# Altium PCB PCB1.PcbDoc
Units mil, origin at the board's own origin, x right, y up, seen from the top; angles counter-clockwise.
Board outline 6000 x 4000 mil, 2 copper layers (Top Layer, Bottom Layer); 15 components, 34 nets, 111 pads, 0 vias.
Unrouted connection lines stored in the file: 11.
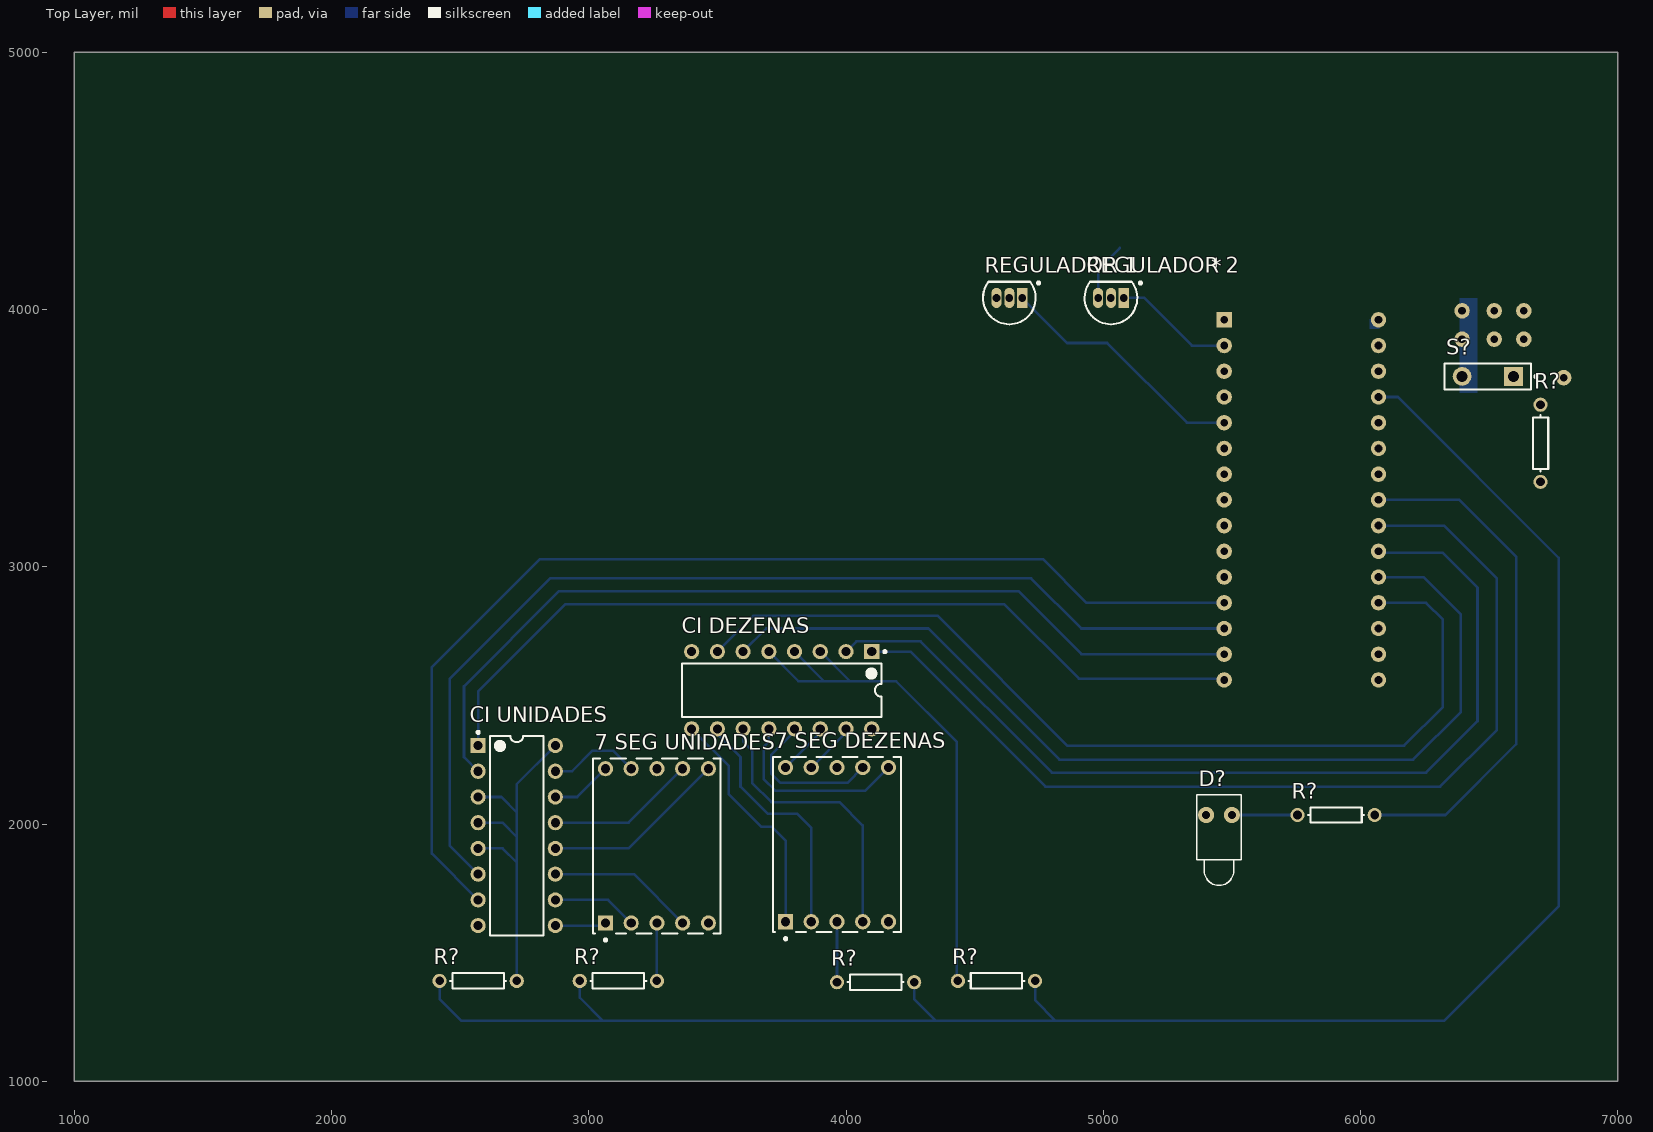
[diagram p0: Top Layer view]
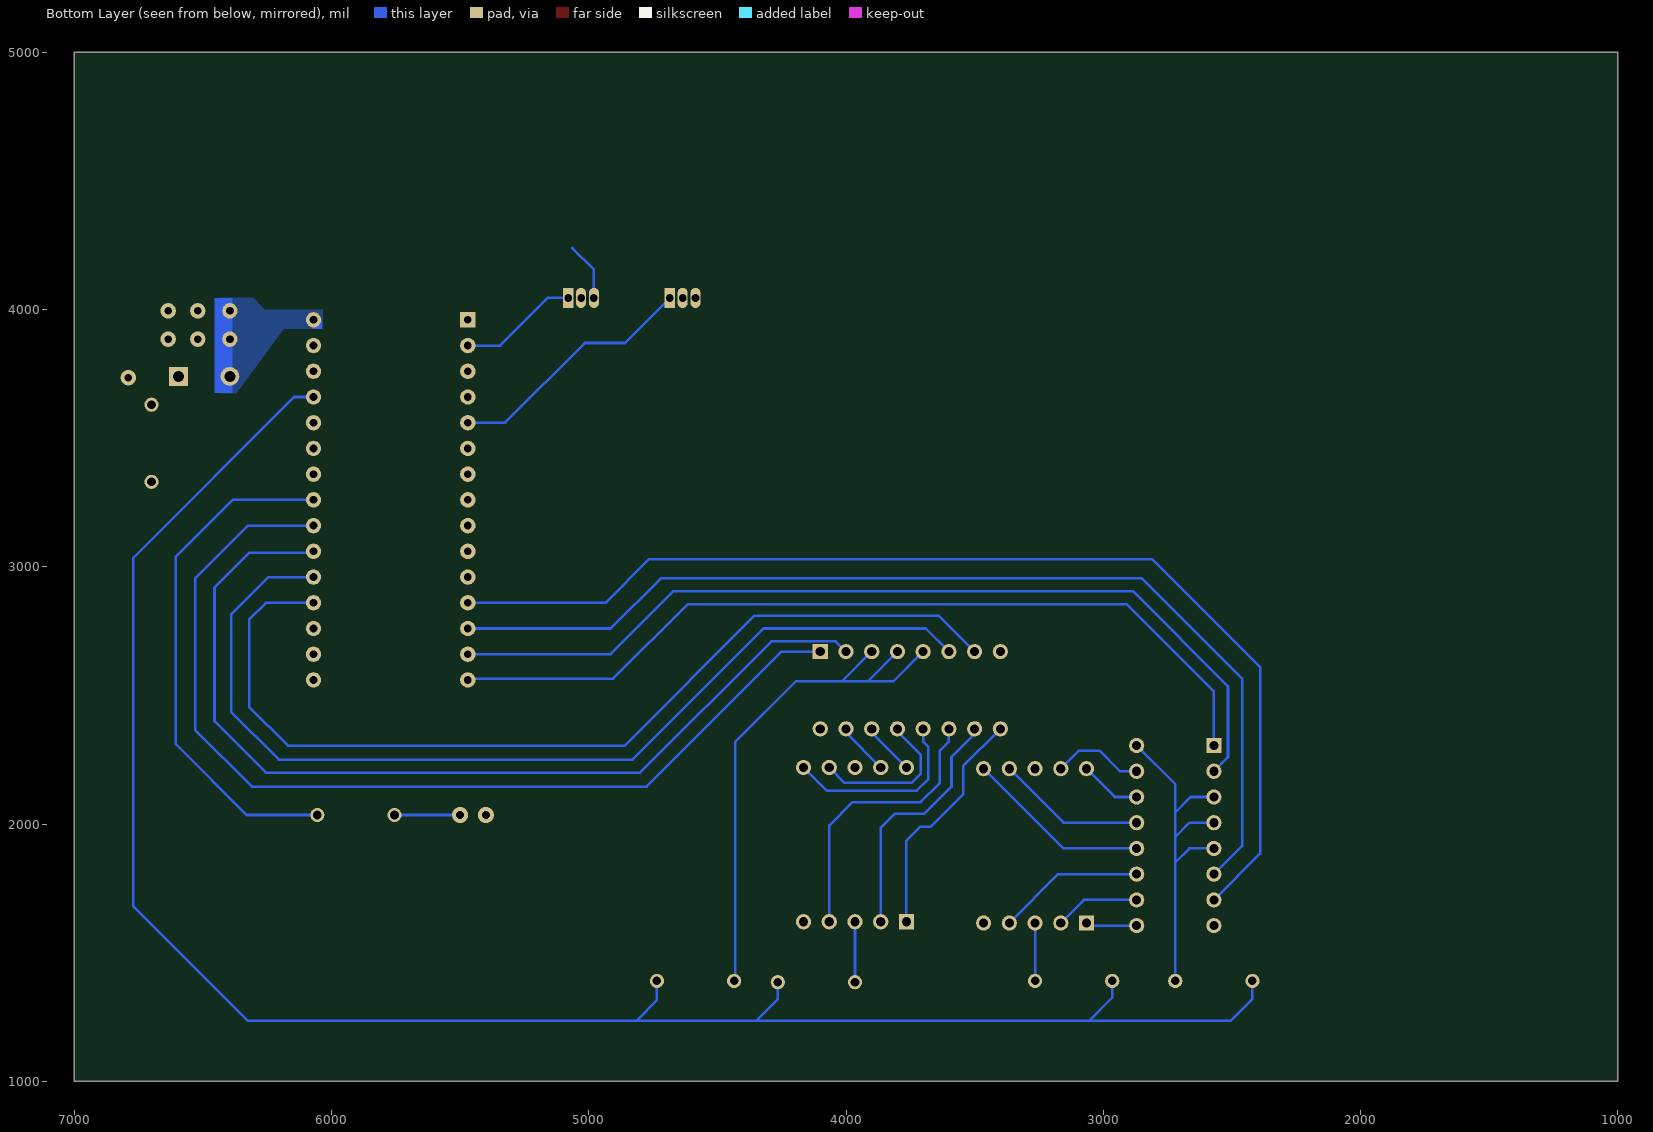
[diagram p1: Bottom Layer view, seen from below]

## Layer stack, top to bottom
Top Solder: solder mask 0.4, Solder Resist, Dk 3.5
Top Layer: signal copper 1.4
Dielectric 1: dielectric 12.6, FR-4, Dk 4.8
Bottom Layer: signal copper 1.4
Bottom Solder: solder mask 0.4, Solder Resist, Dk 3.5

## Board outline
1000,1000 7000,1000 7000,5000 1000,5000

## Design rules (kind name [scope] priority, off if disabled: settings)
Clearance [All] p1: gap=0.2
HoleSize [All] p1: absolutevalues=TRUE maxlimit=100 minlimit=0.3 maxpercent=80.000 minpercent=20.000
PlaneClearance [All] p1: clearance=0.2
PolygonConnect [All] p1: connectstyle=Relief reliefconductorwidth=10 reliefentries=4 polygonreliefangle="90 Angle" airgapwidth=10
RoomDefinition Sheet1 [InComponentClass('Sheet1')] p1: confinementstyle=ConfineIn formatcopy=TRUE lockcomponents=FALSE outline 1590,1050 6955,1050 6955,4955 1590,4955
RoutingVias [All] p1: holewidth=28 width=50 viastyle="Through Hole" minholewidth=28 minwidth=50 maxholewidth=28 maxwidth=50
SolderMaskExpansion [All] p1: expansion=4
UnConnectedPin [All] p1:
Width [All] p1: maxlimit=10 minlimit=0.3 preferedwidth=10
28 further rules are at their usual default settings.

## Classes and differential pairs
component class Sheet1: "7 SEG DEZENAS" "7 SEG UNIDADES" * "CI DEZENAS" "CI UNIDADES" D? DS? R? "REGULADOR 1" "REGULADOR 2" S? U?

## Components (designator, comment, footprint, x,y, rotation, side; value= is the part's Value field where it differs from the comment)
"7 SEG DEZENAS" "HDSP-5601" H-10 3965,1920 r0 top
"7 SEG UNIDADES" "HDSP-5601" H-10 3265,1915 r0 top
* "arduinoNano" "Arduino nano" 5410,4120 r270 top
"CI DEZENAS" "SN74LS47N" TI-N16 3750,2520 r270 top
"CI UNIDADES" "SN74LS47N" TI-N16 2720,1955 r0 top
D? "LED1" LED-1 5450,2035 r270 top
R? "Res1" AXIAL-0.3 4115,1385 r0 top
R? "Res1" AXIAL-0.3 2570,1390 r180 top
R? "Res1" AXIAL-0.3 4585,1390 r0 top
R? "330" AXIAL-0.3 5905,2035 r180 top
R? "Res1" AXIAL-0.3 6700,3480 r90 top
R? "Res1" AXIAL-0.3 3115,1390 r180 top
"REGULADOR 1" "LM78L05ACZ" Z03A 4635,4045 r90 top
"REGULADOR 2" "LM78L05ACZ" Z03A 5030,4045 r90 top
S? "SW-PB" SPST-2 6495,3740 r180 top

## Footprints (in the part's own frame and the unit in brackets; to place one, negate y for a bottom-side part, rotate by r counter-clockwise, add the part's x,y. Pads: shape width x height; smd on the part's side, far side on the other; paste and mask are expansions set on the pad)
"Arduino nano" [mil] "arduino nano"
  rect 60x60 hole 30: 0(160,60)
  round 60 hole 30: 1(260,60) 2(360,60) 3(460,60) 4(560,60) 5(660,60) 6(760,60) 7(860,60) 8(960,60) 9(1060,60) 10(1160,60) 11(1260,60) 12(1360,60) 13(1460,60) 14(1560,60) 15(1560,660) 16(1460,660) 17(1360,660) 18(1260,660) 19(1160,660) 20(1060,660) 21(960,660) 22(860,660) 23(760,660) 24(660,660) 25(560,660) 26(460,660) 27(360,660) 28(260,660) 29(160,660)
AXIAL-0.3 [mm] "Axial Device, Thru-Hole; 2 Leads; 0.3 in Pin Spacing"
  round 1.4 hole 0.85: 1(-3.81,0) 2(3.81,0)
  silkscreen extent -2.77,-0.76 2.77,0.76
H-10 [mm] "LED, 7-Segment Display, 14.22 mm, RHD; 10 Leads; Row Space 15.24 mm; Pitch 2.54 mm"
  rect 1.5x1.5 hole 0.9: 1(-5.08,-7.62)
  round 1.5 hole 0.9: 2(-2.54,-7.62) 3(0,-7.62) 4(2.54,-7.62) 5(5.08,-7.62) 6(5.08,7.62) 7(2.54,7.62) 8(0,7.62) 9(-2.54,7.62) 10(-5.08,7.62)
  silkscreen extent -6.3,-9.42 6.3,8.65
LED-1 [mm] "LED; 2 Leads"
  round 1.6 hole 0.8: 1(0,1.27) 2(0,-1.27)
  silkscreen extent -2,-2.2 6.95,2.2
SPST-2 [mm] "Switch; 2 Leads"
  rect 1.85x1.85 hole 1.1: 1(-2.54,0)
  round 1.85 hole 1.1: 2(2.54,0)
  silkscreen extent -4.89,-1.27 4.28,1.27
TI-N16 [mm] "DIP, 16-Leads, Body 19.305x6.35 mm, Pitch 2.54 mm"
  rect 1.5x1.5 hole 0.9: 1(-3.81,8.89)
  round 1.5 hole 0.9: 2(-3.81,6.35) 3(-3.81,3.81) 4(-3.81,1.27) 5(-3.81,-1.27) 6(-3.81,-3.81) 7(-3.81,-6.35) 8(-3.81,-8.89) 9(3.81,-8.89) 10(3.81,-6.35) 11(3.81,-3.81) 12(3.81,-1.27) 13(3.81,1.27) 14(3.81,3.81) 15(3.81,6.35) 16(3.81,8.89)
  silkscreen extent -3.93,-9.85 2.65,10.32, body extent -3.95,-9.85 3.95,9.85, height 5.08
Z03A [mm] "TO, Flat Index; 3 In-Line, Axial Leads; Body Dia. 5mm; Leads 0.55 x 0.50 mm (max)"
  rect 2x1 hole 0.75: 1(0,-1.27)
  oval 2x1 hole 0.75: 2(0,0) 3(0,1.27)
  silkscreen extent -2.6,-3.03 1.6,2.6, body extent -2.6,-2.61 1.6,2.61, height 5.2

## Part data
"7 SEG DEZENAS" "7 SEG UNIDADES": "14.22 mm Gray Surface Green 7-Segment Display: CA, RH DP"
"CI DEZENAS" "CI UNIDADES": "BCD-to-7-Segment Decoder / Driver, 4.75 to 5.25 V, 0 to 70 degC, 16-pin DIP (N16), Pb-Free (RoHS)"
D?: "Typical RED GaAs LED"
R? R? R? R? R?: "Resistor"
R?: library part Res1, "Resistor"
"REGULADOR 1" "REGULADOR 2": "3-Terminal Positive Regulators, 3-pin TO-92"
S?: "Switch"

## Free pads (board coordinates)
  round 60 hole 30: 2(6395,3995) 3(6395,3885) 5(6790,3735) 6(6520,3995) 7(6635,3995) 8(6520,3885) 9(6635,3885)

## Nets (pads, with @x,y where several pads share a name; then routed paths per layer and width w, separated by ;. In a path a pad name is that pad's centre, name@x,y a point inside that pad or via, vN(x,y) a via of type N, cw(c..) or ccw(c..) an arc to the next point about the centre after c; other vN are vias at no path point)
12V: S?.1
GND: "CI DEZENAS.8" "CI UNIDADES.8" "REGULADOR 1.2" "REGULADOR 2.2" D?.2
"Net7 SEG DEZENAS_1": "7 SEG DEZENAS.1" "CI DEZENAS.9" | length 924.6
  Bottom Layer w10: 3400,2370 3545,2225 3545,2115 3670,1990 3710,1990 3765,1935 3765,1620
"Net7 SEG DEZENAS_2": "7 SEG DEZENAS.2" "CI DEZENAS.10" | length 968.6
  Bottom Layer w10: 3500,2370 3500,2350 3590,2260 3590,2145 3695,2040 3810,2040 3865,1985 3865,1620
"Net7 SEG DEZENAS_3": "7 SEG DEZENAS.3" R?.1@3965,1385 | length 235
  Bottom Layer w10: R?.1@3965,1385 3965,1620
"Net7 SEG DEZENAS_4": "7 SEG DEZENAS.4" "CI DEZENAS.11" | length 1097.8
  Bottom Layer w10: 3600,2370 3600,2320 3635,2285 3635,2160 3710,2085 3975,2085 4065,1995 4065,1620
"Net7 SEG DEZENAS_6": "7 SEG DEZENAS.6" "CI DEZENAS.12" | length 744.2
  Bottom Layer w10: 3700,2370 3700,2320 3680,2300 3680,2175 3725,2130 4075,2130 4165,2220
"Net7 SEG DEZENAS_7": "7 SEG DEZENAS.7" "CI DEZENAS.13" | length 606.6
  Bottom Layer w10: 3800,2370 3800,2360 3710,2270 3710,2195 3745,2160 4005,2160 4065,2220
"Net7 SEG DEZENAS_9": "7 SEG DEZENAS.9" "CI DEZENAS.15" | length 205.9
  Bottom Layer w10: 3865,2220 4000,2355 4000,2370
"Net7 SEG DEZENAS_10": "7 SEG DEZENAS.10" "CI DEZENAS.14" | length 205.9
  Bottom Layer w10: 3765,2220 3900,2355 3900,2370
"Net7 SEG UNIDADES_1": "7 SEG UNIDADES.1" "CI UNIDADES.9" | length 185
  Bottom Layer w10: 2870,1605 3055,1605
"Net7 SEG UNIDADES_2": "7 SEG UNIDADES.2" "CI UNIDADES.10" | length 332.3
  Bottom Layer w10: 2870,1705 3075,1705 3165,1615
"Net7 SEG UNIDADES_3": "7 SEG UNIDADES.3" R?.1@3265,1390 | length 225
  Bottom Layer w10: R?.1@3265,1390 3265,1615
"Net7 SEG UNIDADES_4": "7 SEG UNIDADES.4" "CI UNIDADES.11" | length 573.7
  Bottom Layer w10: 2870,1805 3175,1805 3365,1615
"Net7 SEG UNIDADES_6": "7 SEG UNIDADES.6" "CI UNIDADES.12" | length 723.4
  Bottom Layer w10: 2870,1905 3155,1905 3465,2215
"Net7 SEG UNIDADES_7": "7 SEG UNIDADES.7" "CI UNIDADES.13" | length 582
  Bottom Layer w10: 2870,2005 3155,2005 3365,2215
"Net7 SEG UNIDADES_9": "7 SEG UNIDADES.9" "CI UNIDADES.15" | length 357.1
  Bottom Layer w10: 2870,2205 2935,2205 3015,2285 3095,2285 3165,2215
"Net7 SEG UNIDADES_10": "7 SEG UNIDADES.10" "CI UNIDADES.14" | length 240.6
  Bottom Layer w10: 2870,2105 2955,2105 3065,2215
Net*_1: "REGULADOR 2.1" *.1 | length 466.6
  Bottom Layer w10: 5080,4045 5160,4045 5345,3860 *.1
Net*_4: "REGULADOR 1.1" *.4 | length 985.9
  Bottom Layer w10: 4685,4045 4860,3870 5015,3870 5325,3560 *.4
Net*_11: "CI UNIDADES.7" *.11 | length 4303.9
  Bottom Layer w10: 2570,1705 2390,1885 2390,2610 2810,3030 4765,3030 4935,2860 *.11
Net*_12: "CI UNIDADES.6" *.12 | length 4057.9
  Bottom Layer w10: 2570,1805 2460,1915 2460,2565 2850,2955 4720,2955 4915,2760 *.12
Net*_13: "CI UNIDADES.2" *.13 | length 3562.5
  Bottom Layer w10: 2570,2205 2515,2260 2515,2535 2885,2905 4670,2905 4915,2660 *.13
Net*_14: "CI UNIDADES.1" *.14 | length 3366
  Bottom Layer w10: 2570,2305 2570,2515 2910,2855 4615,2855 4905,2565 *.14@5465,2565
Net*_18: "CI DEZENAS.7" *.18 | length 3766.2
  Bottom Layer w10: 3500,2670 3640,2810 4355,2810 4860,2305 6170,2305 6320,2455 6320,2795 6255,2860 *.18
Net*_19: "CI DEZENAS.6" *.19 | length 3875.2
  Bottom Layer w10: 3600,2670 3690,2760 4320,2760 4830,2250 6205,2250 6390,2435 6390,2815 6245,2960 *.19
Net*_20: "CI DEZENAS.2" *.20 | length 3720.8
  Bottom Layer w10: 4000,2670 4040,2710 4290,2710 4800,2200 6255,2200 6455,2400 6455,2918.59 6318.59,3055 *.20@6075,3055
Net*_21: "CI DEZENAS.1" *.21 | length 3873.5
  Bottom Layer w10: 4100,2670 4250,2670 4775,2145 6310,2145 6530,2365 6530,2955 6325,3160 *.21
Net*_22: *.22 R?.1@6055,2035 | length 2019.7
  Bottom Layer w10: R?.1@6055,2035 6330,2035 6605,2310 6605,3039.42 6384.42,3260 *.22
Net*_24: *.24 *.26 R?.1@6700,3330 R?.2@2420,1390 R?.2@2965,1390 R?.2@4265,1385 R?.2@4735,1390 R?.2@6700,3630 | length 7519
  Bottom Layer w10: R?.2@2420,1390 2420,1320 2505,1235 3055,1235 ; R?.2@2965,1390 2965,1325 3055,1235 ; R?.2@4265,1385 4265,1320 4350,1235 ; R?.2@4735,1390 4735,1315 4815,1235 ; *.26 6145,3660 6770,3035 6770,1680 6325,1235 4815,1235 ; 3055,1235 4350,1235 ; 4350,1235 4815,1235
Net*_29: "REGULADOR 1.3" "REGULADOR 2.3" *.29 S?.2 | length 230.2
  Bottom Layer w10: 4980,4045 4980,4155 5065,4240
"NetCI DEZENAS_3": "CI DEZENAS.3" "CI DEZENAS.4" "CI DEZENAS.5" "CI DEZENAS.16" R?.1@4435,1390 | length 2125.2
  Bottom Layer w10: 3700,2670 3815,2555 3915,2555 ; 3800,2670 3915,2555 ; 3900,2670 4015,2555 ; R?.1@4430,1395 4430,2320 4195,2555 4015,2555 ; 3915,2555 4015,2555
"NetCI UNIDADES_3": "CI UNIDADES.3" "CI UNIDADES.4" "CI UNIDADES.5" "CI UNIDADES.16" R?.1@2720,1390 | length 1497.5
  Bottom Layer w10: 2570,1905 2665,1905 2720,1850 ; 2570,2005 2665,2005 2720,1950 ; 2570,2105 2660,2105 2720,2045 ; R?.1@2720,1390 2720,1850 ; 2870,2305 2720,2155 2720,2045 ; 2720,1850 2720,1950 ; 2720,1950 2720,2045
NetD?_1: D?.1 R?.2@5755,2035 | length 255
  Bottom Layer w10: D?.1 R?.2@5755,2035
pads on no net: "7 SEG DEZENAS.5" "7 SEG DEZENAS.8" "7 SEG UNIDADES.5" "7 SEG UNIDADES.8" *.0 *.2 *.3 *.5 *.6 *.7 *.8 *.9 *.10 *.15 *.16 *.17 *.23 *.25 *.27 *.28

## Polygon pours and split planes (outlines as drawn)
no net on Bottom Layer "Bottom Layer-No Net" (solid, pour order 2): 6035,4000 6245,4000 6260,4000 6305,4045 6435,4045 6435,3675 6370,3675 6185,3925 6180,3925 6035,3925

## Other copper
Bottom Layer:
  rectangle net Net*_29: 6385,3675 6455,4045
  rectangle net Net*_29: 6035,3925 6073.83,3963.83